# Altium PCB PCB.PcbDoc
Units mil, origin at the board's own origin, x right, y up, seen from the top; angles counter-clockwise.
Board outline 3200 x 2000 mil, 2 copper layers (Top Layer, Bottom Layer); 70 components, 58 nets, 261 pads, 72 vias.
Unrouted connection lines stored in the file: 2.
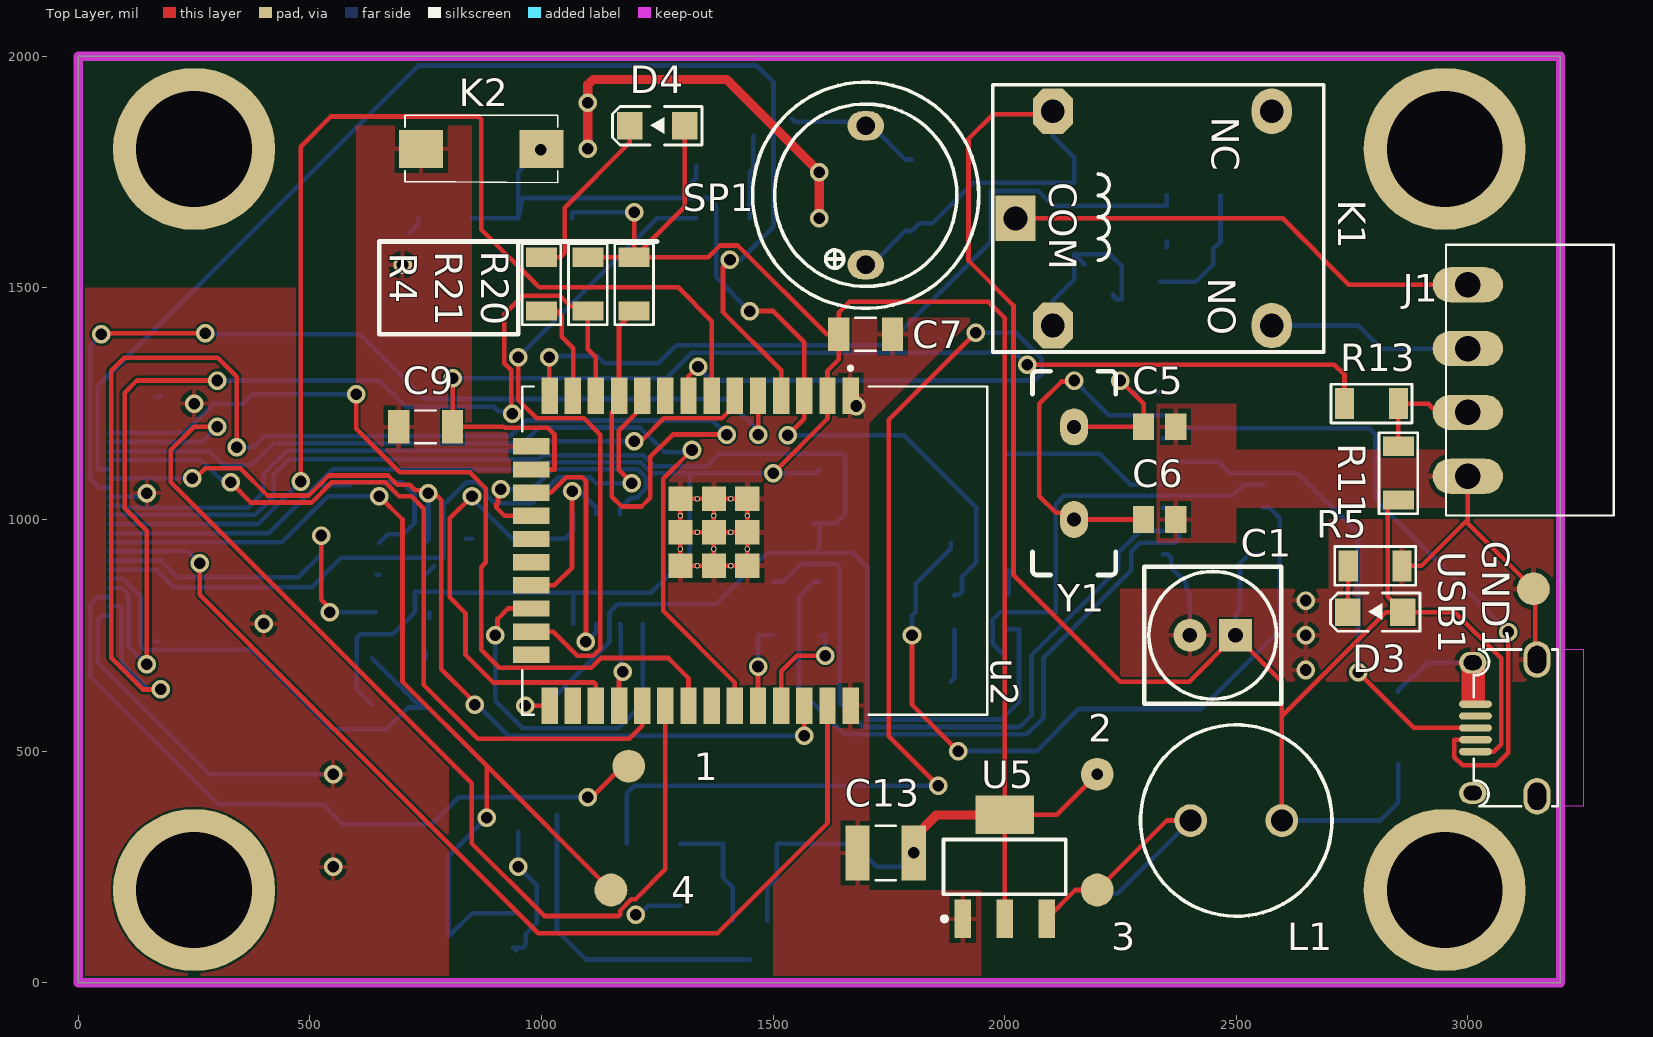
[diagram p0: Top Layer view]
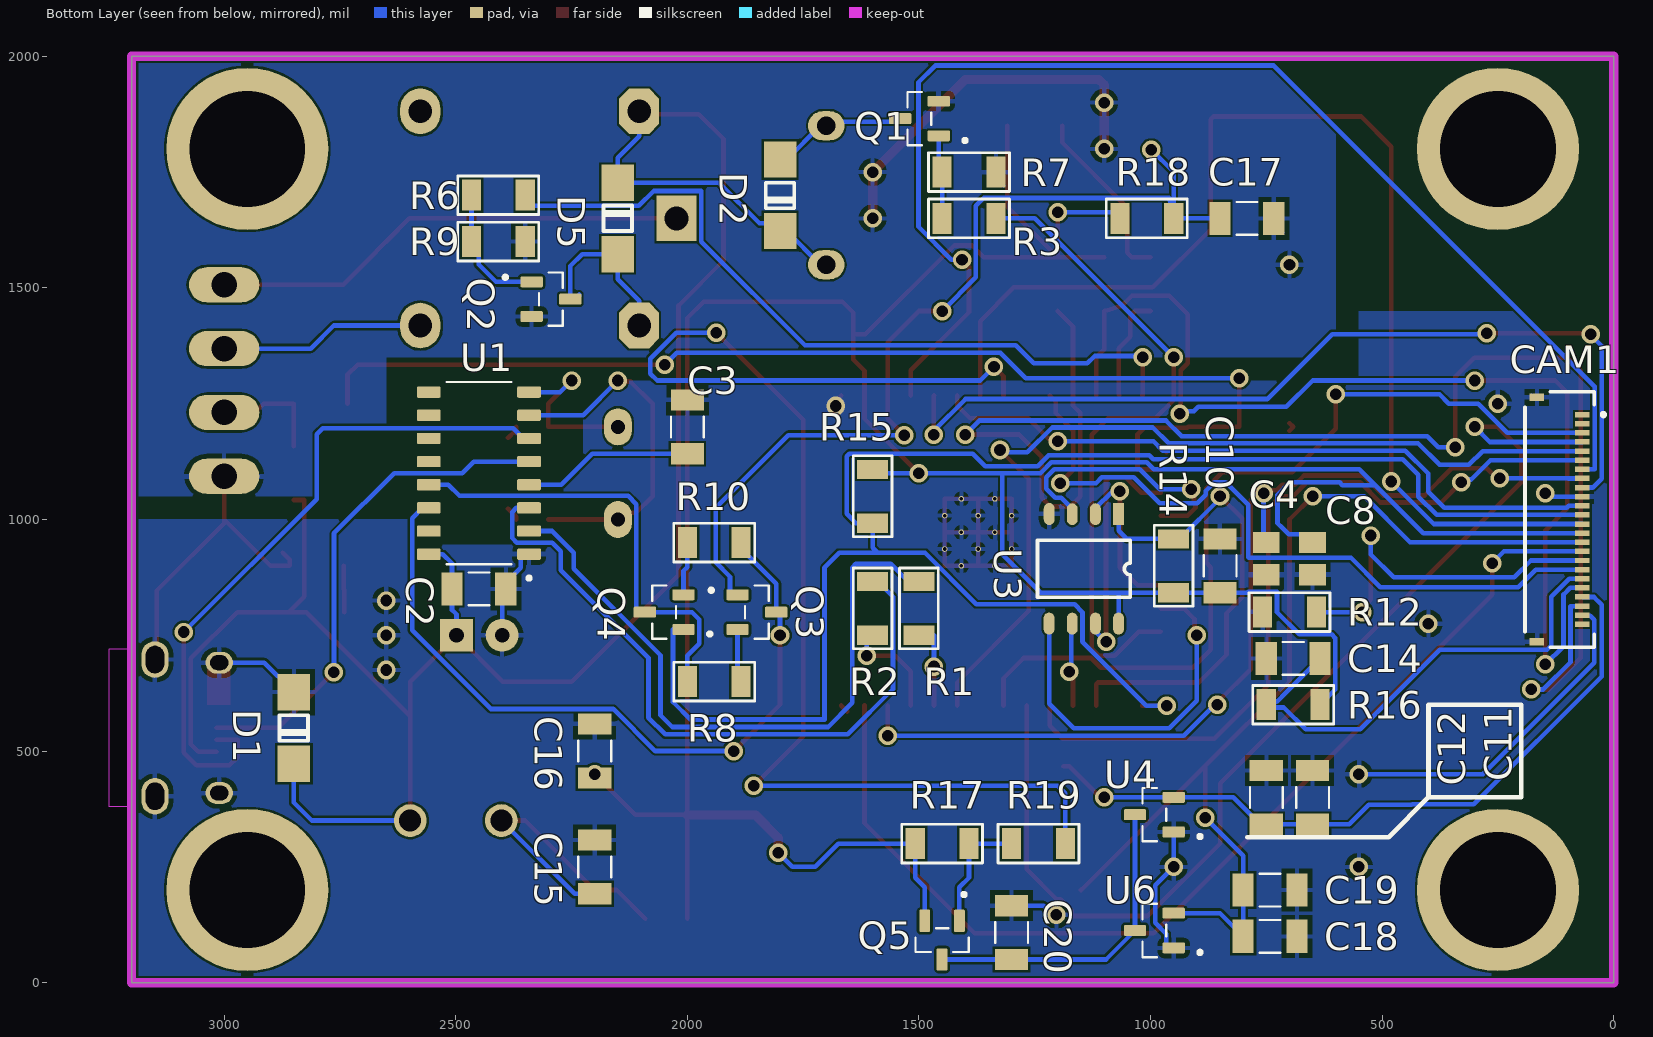
[diagram p1: Bottom Layer view, seen from below]
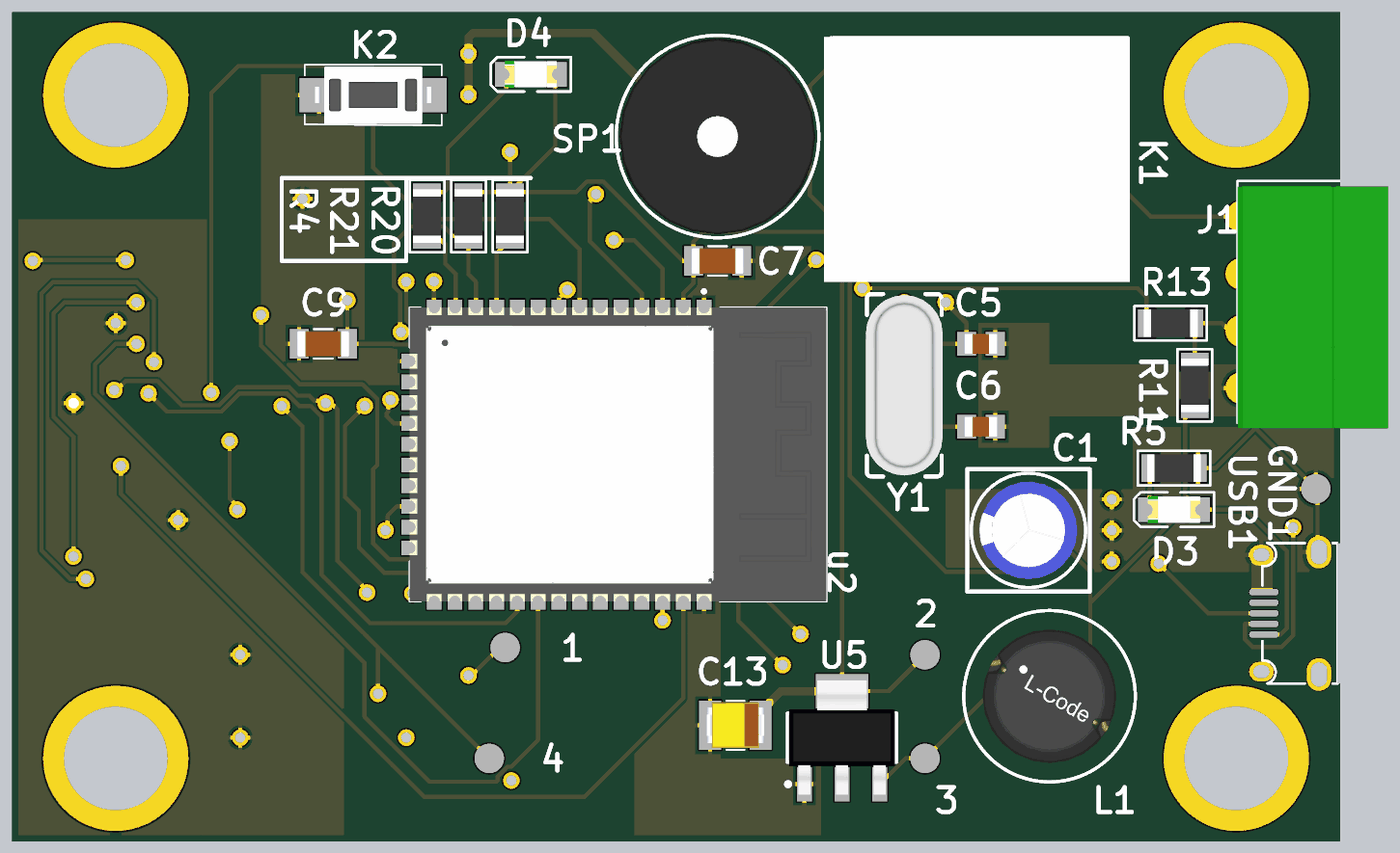
[diagram p2: 3D render of the assembled board from above, using the file's embedded part models]
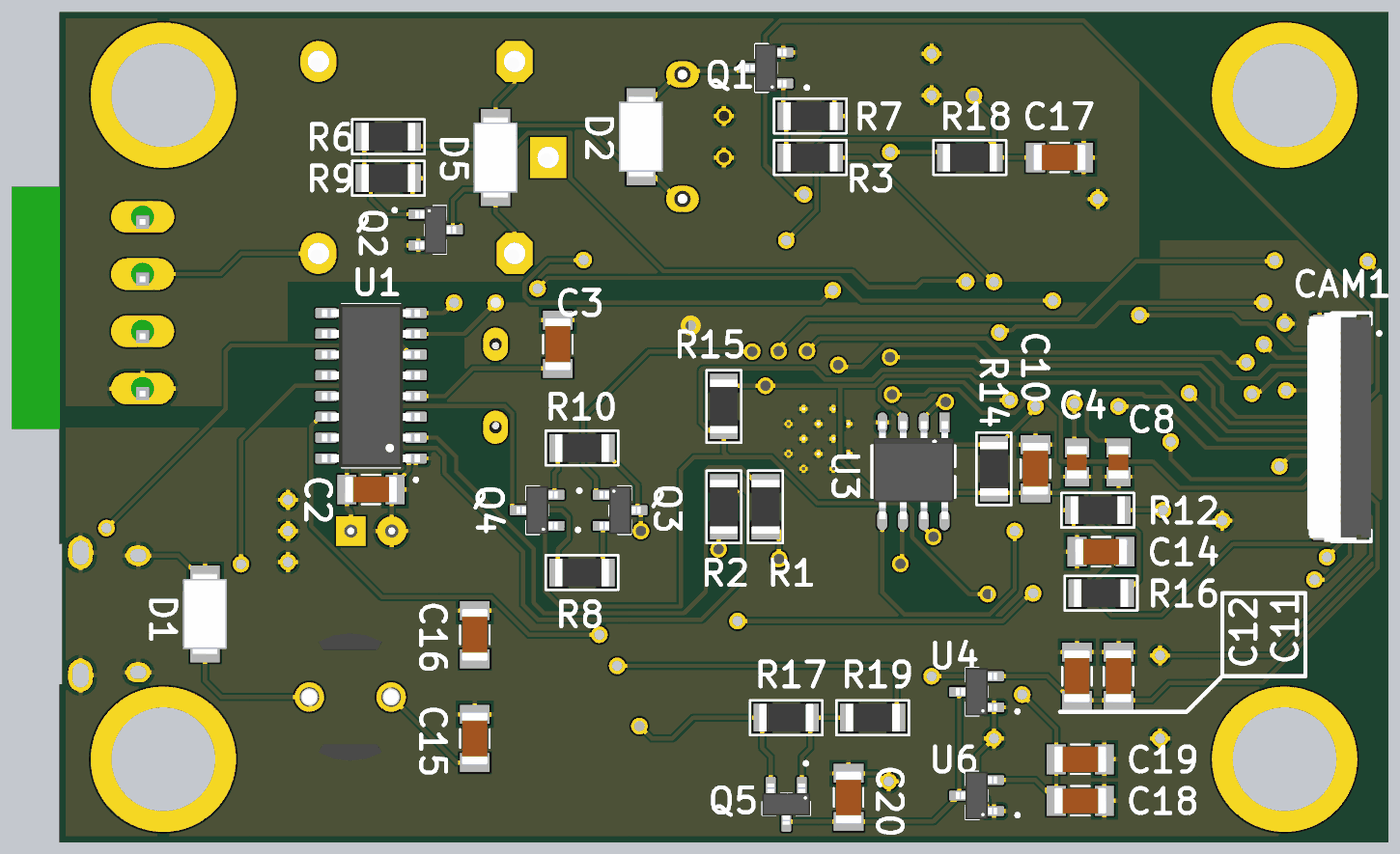
[diagram p3: 3D render of the assembled board from below, using the file's embedded part models]

## Layer stack, top to bottom
Top Solder: solder mask 0.4, Solder Resist, Dk 3.5
Top Layer: signal copper 1.4
Dielectric 1: dielectric 12.6, FR-4, Dk 4.8
Bottom Layer: signal copper 1.4
Bottom Solder: solder mask 0.4, Solder Resist, Dk 3.5

## Board outline
0,0 0,2000 3200,2000 3200,0

## Design rules (kind name [scope] priority, off if disabled: settings)
Clearance [All] p1: gap=5 ignorepadtopadclearanceinfootprint=FALSE
HoleSize [All] p1: absolutevalues=TRUE maxlimit=1000 minlimit=1 maxpercent=80.000 minpercent=20.000
MinimumSolderMaskSliver [All] p1: minsoldermaskwidth=5
PolygonConnect [All] p1: connectstyle=Relief reliefconductorwidth=10 reliefentries=4 polygonreliefangle="90 Angle" airgapwidth=10
RoutingVias [All] p1: holewidth=25 width=40 viastyle="Through Hole" minholewidth=25 minwidth=40 maxholewidth=28 maxwidth=50
SilkToSilkClearance [All] p1: silktosilkclearance=5
SolderMaskExpansion [All] p1: expansion=4 istentingtop=FALSE
SupplyNets "Schematic Supply Nets_5" [InNet('+5')] p1: voltage=0.000
SupplyNets "Schematic Supply Nets_4" [InNet('CSI_1.2V')] p2: voltage=0.000
SupplyNets "Schematic Supply Nets_3" [InNet('CSI_2.8V')] p3: voltage=0.000
SupplyNets "Schematic Supply Nets_1" [InNet('GND')] p4: voltage=0.000
SupplyNets "Schematic Supply Nets" [InNet('+3.3')] p5: voltage=0.000
Width [All] p1: maxlimit=20 minlimit=10 preferedwidth=10
27 further rules are at their usual default settings.

## Components (designator, comment, footprint, x,y, rotation, side; value= is the part's Value field where it differs from the comment)
1 "TP/2.8V" test_point 1188.27,467.44 r0 top
2 "TP/3.3V" test_point 2200,450 r90 top
3 "TP/5V" test_point 2200,200 r90 top
4 "TP/1.2V" test_point 1150,200 r90 top
C1 "100uF" TH_electrolite 2449.21,750 r180 top
C2 "0.1uF" SMD_1206 2450,850 r180 bottom
C3 "100nF" SMD_1206 2000,1200 r90 bottom
C4 "15pF" SMD_0805 750,915.35 r90 bottom
C5 "10pF" SMD_0805 2334.64,1200 r180 top
C6 "10pF" SMD_0805 2334.65,1000 r180 top
C7 "0.1uF" SMD_1206 1700,1400 r0 top
C8 "0.1uF" SMD_0805 650,915.35 r90 bottom
C9 "100nF" SMD_1206 750,1200 r180 top
C10 "1uF" SMD_1206 850,900 r270 bottom
C11 "10uF" SMD_1206 650,400 r90 bottom
C12 "0.1uF" SMD_1206 750,400 r90 bottom
C13 "100uF 10V" "B size (1210)" 1743,280 r180 top
C14 "0.1uF" SMD_1206 691.93,700 r0 bottom
C15 "10uF 16V" SMD_1206 2200,250 r90 bottom
C16 "10uF 10V" SMD_1206 2200,500 r90 bottom
C17 "0.1uF" SMD_1206 791.93,1650 r180 bottom
C18 "10uF" SMD_1206 741.93,100 r180 bottom
C19 "0.1uF" SMD_1206 741.93,200 r180 bottom
C20 "10uF" SMD_1206 1300,108.07 r90 bottom
CAM1 "FFC2B28-24-G" FFC_24pin_smd 116.73,1000 r270 bottom
D1 "SM4007" SOD-123F 2850,550 r270 bottom
D2 "SM4007" SOD-123F 1800,1700 r270 bottom
D3 "Red" LED_SMD_1206 2800,800 r0 top
D4 "Green" LED_SMD_1206 1250,1850 r0 top
D5 "SM4007" SOD-123F 2150,1650 r90 bottom
GND1 "TP/GND" test_point 3141.72,850.22 r90 top
J1 "phoenix_header_4pin" phoenix_header_4pin 3000,1300 r180 top
K1 "Relay" relay_milon 2300,1650 r270 top
K2 "Key" "key smd" 870.08,1800 r0 top
L1 "100uH" Indicator_DIP 2500,350 r180 top
Q1 "2N7002" SOT23-3L 1499.05,1865.53 r0 bottom
Q2 "2N7002" SOT23-3L 2294.55,1475.65 r180 bottom
Q3 "BC337" SOT23-3L 1850,800 r180 bottom
Q4 "BC337" SOT23-3L 2050,800 r0 bottom
Q5 "FDN360P" SOT23-3L 1450,91.73 r270 bottom
R1 "470" "resistor 1206" 1500,808.07 r270 bottom
R2 "470" "resistor 1206" 1600,808.07 r270 bottom
R3 "500" "resistor 1206" 1391.93,1650 r180 bottom
R4 "1K" "resistor 1206" 1000,1508.07 r90 top
R5 "10K" "resistor 1206" 2800,900 r180 top
R6 "1K" "resistor 1206" 2408.07,1700 r180 bottom
R7 "1K" "resistor 1206" 1391.93,1750 r0 bottom
R8 "12K" "resistor 1206" 1941.93,650 r0 bottom
R9 "8.2K" "resistor 1206" 2408.07,1600 r0 bottom
R10 "12K" "resistor 1206" 1941.93,950 r180 bottom
R11 "8.2K" "resistor 1206" 2850,1100 r90 top
R12 "1K" "resistor 1206" 700,800 r180 bottom
R13 "470" "resistor 1206" 2791.93,1250 r180 top
R14 "10K" "resistor 1206" 950,900 r90 bottom
R15 "1K" "resistor 1206" 1600,1050 r270 bottom
R16 "4.7K" "resistor 1206" 691.93,600 r180 bottom
R17 "10K" "resistor 1206" 1450,300 r0 bottom
R18 "10K" "resistor 1206" 1008.07,1650 r0 bottom
R19 "1K" "resistor 1206" 1241.93,300 r0 bottom
R20 "4.7K" "resistor 1206" 1200,1508.07 r90 top
R21 "4.7K" "resistor 1206" 1100,1508.07 r90 top
SP1 "buzzer 5V" BUZZER 1700,1700 r90 top
U1 "CH340G" SOP_16 2450,1100 r0 bottom
u2 "ESP32_MCU" "38-SMD Module" 1322.83,932.87 r270 top
U3 "IPUS_IPS6404" SOP-8 1218.74,911.83 r270 bottom
U4 "XC6206-2.8V" SOT23-3L 991.73,362.6 r0 bottom
U5 "AMS1117" SOT-223 2000,250 r90 top
U6 "XC6206-1.2V" SOT23-3L 991.73,112.6 r0 bottom
USB1 "Micro_usb" micro_usb_smd 3100,550 r0 top
Y1 "Xtal" xtal 2150,1100 r270 top

## Footprints (in the part's own frame and the unit in brackets; to place one, negate y for a bottom-side part, rotate by r counter-clockwise, add the part's x,y. Pads: shape width x height; smd on the part's side, far side on the other; paste and mask are expansions set on the pad)
"38-SMD Module" [mm] "ESP32_mcu"
  rect 2x0.9 smd: 1(-8.5,8.755) 2(-8.5,7.485) 3(-8.5,6.215) 4(-8.5,4.945) 5(-8.5,3.675) 6(-8.5,2.405) 7(-8.5,1.135) 8(-8.5,-0.135) 9(-8.5,-1.405) 10(-8.5,-2.675) 11(-8.5,-3.945) 12(-8.5,-5.215) 13(-8.5,-6.485) 14(-8.5,-7.755) 25(8.5,-7.755) 26(8.5,-6.485) 27(8.5,-5.215) 28(8.5,-3.945) 29(8.5,-2.675) 30(8.5,-1.405) 31(8.5,-0.135) 32(8.5,1.135) 33(8.5,2.405) 34(8.5,3.675) 35(8.5,4.945) 36(8.5,6.215) 37(8.5,7.485) 38(8.5,8.755)
  rect 0.9x2 smd: 15(-5.715,-8.755) 16(-4.445,-8.755) 17(-3.175,-8.755) 18(-1.905,-8.755) 19(-0.635,-8.755) 20(0.635,-8.755) 21(1.905,-8.755) 22(3.175,-8.755) 23(4.445,-8.755) 24(5.715,-8.755)
  rect 1.33x1.33 smd: 39_1(-2.835,3.09) 39_2(-1,3.09) 39_3(0.835,3.09) 39_4(-2.835,1.255) 39_5(-1,1.255) 39_6(0.835,1.255) 39_7(-2.835,-0.58) 39_8(-1,-0.58) 39_9(0.835,-0.58)
  round 0.3 hole 0.2: 39_10(-1.917,3.09) 39_11(-0.082,3.09) 39_12(-2.835,2.173) 39_13(-1,2.173) 39_14(0.835,2.173) 39_15(-1.917,1.255) 39_16(-0.082,1.255) 39_17(-2.835,0.338) 39_18(-1,0.338) 39_19(0.835,0.338) 39_20(-1.917,-0.58) 39_21(-0.082,-0.58)
  silkscreen extent -10.1,-9.25 9,16.25, body extent -9,-9.25 9,16.25, height 3.25
"B size (1210)" [mm]
  rect 1.34x3.02 smd: 1(-1.54,0) 2(1.54,0)
  silkscreen extent -0.55,-1.5 0.55,1.5, body extent -1.75,-1.4 1.75,1.4, height 2.1
BUZZER [mm]
  oval 1.6x2 hole 1: 1(-3.81,0) 2(3.81,0)
  silkscreen extent -6.2,-6.2 6.2,6.2, body extent -6,-6 6,6, height 9.5
FFC_24pin_smd [mm]
  rect 0.3x0.8 smd: 1(-5.75,1.25) 2(-5.25,1.25) 3(-4.75,1.25) 4(-4.25,1.25) 5(-3.75,1.25) 6(-3.25,1.25) 7(-2.75,1.25) 8(-2.25,1.25) 9(-1.75,1.25) 10(-1.25,1.25) 11(-0.75,1.25) 12(-0.25,1.25) 13(0.25,1.25) 14(0.75,1.25) 15(1.25,1.25) 16(1.75,1.25) 17(2.25,1.25) 18(2.75,1.25) 19(3.25,1.25) 20(3.75,1.25) 21(4.25,1.25) 22(4.75,1.25) 23(5.25,1.25) 24(5.75,1.25)
  rect 0.4x0.8 smd: S1(-6.7,-1.25) S2(6.7,-1.25)
  silkscreen extent -7,-1.9 7,2.5, body extent -7,-1.9 7,1.9, height 1.1
Indicator_DIP [mm]
  round 1.8 hole 1.2: 1(-2.5,0) 2(2.5,0)
  silkscreen extent -5.25,-5.25 5.25,5.25, body extent -4.1,-4.1 4.1,4.09, height 7.24
"key smd" [mm] "tac switch"
  rect 2.4x2.1 smd: 1(-3.3,0) 2(3.3,0)
  silkscreen extent -4.19,-1.86 4.19,1.85, body extent -3.55,-1.75 3.55,1.75, height 4.3
LED_SMD_1206 [mm]
  rect 1.4x1.5 smd: 1(-1.5,0) 2(1.5,0)
  silkscreen extent -2.45,-1.05 2.45,1.05, body extent -1.6,-0.8 1.6,0.8, height 0.68
micro_usb_smd [mm] "4 pin holder"
  oval 1.8x0.4 smd mask+0.05: 1(-2.12,-1.3) 2(-2.12,-0.65) 3(-2.12,0) 4(-2.12,0.65) 5(-2.12,1.3)
  oval 1.5x1.2 hole 0.8 slot 1 at 0 deg mask+0.05: 5(-2.271,-3.575) 5(-2.271,3.575)
  oval 1.5x2 hole 1 slot 1.5 at 90 deg mask+0.05: 5(1.255,-3.75) 5(1.255,3.75)
  Keep-Out Layer board cut-out: 2.38,4.3 3.792,4.3 3.792,-4.3 2.38,-4.3
  silkscreen extent -2.21,-4.3 2.39,4.31, body extent -2.02,-4.33 3.88,4.32, height 2.8
phoenix_header_4pin [mil]
  oval 152x76 hole 55.12: P1(0,206.69) P2(0,68.9) P3(0,-68.9) P4(0,-206.69)
  silkscreen extent -315,-293 47,291, body extent -315,-279 47,304, height 285
relay_milon [mm]
  rect 2.5x2.2 hole 1.3: 1(0,-7.025)
  oval 2.5x2.2 hole 1.3: 2(-5.875,7.025) 3(5.875,7.025)
  oct 2.5x2.2 hole 1.3: 4(-5.875,-4.975) 5(5.875,-4.975)
  silkscreen extent -7.32,-8.28 7.33,9.87, body extent -7.37,-8.71 7.63,9.98, height 15.7
"resistor 1206" [mm]
  rect 1.05x1.7 smd: 1(-1.475,0) 2(1.475,0)
  silkscreen extent -2.22,-1.06 2.22,1.06, body extent -1.65,-0.85 1.65,0.85, height 0.94
SMD_0805 [mm]
  rect 1.16x1.47 smd: 1(-0.88,0) 2(0.88,0)
  body extent -1,-0.63 1,0.63, height 0.94
SMD_1206 [mm]
  rect 1.16x1.82 smd: 1(-1.475,0) 2(1.475,0)
  silkscreen extent -0.57,-0.9 0.57,0.9, body extent -1.6,-0.8 1.6,0.8, height 1.8
SOD-123F [mm]
  rect 2x1.8 smd: 1(-1.96,0.01) 2(1.96,0.01)
  silkscreen extent -0.69,-0.8 0.71,0.84, body extent -2.5,-1.35 2.5,1.35, height 2.16
SOP-8 [mm]
  rect 1.2x0.6 smd: 1(-2.53,3.805)
  oval 1.2x0.6 smd: 2(-2.53,2.535) 3(-2.53,1.265) 4(-2.54,0) 5(3.47,-0.005) 6(3.47,1.265) 7(3.47,2.535) 8(3.47,3.805)
  silkscreen extent -1.09,-0.64 2.04,4.44, body extent -2.61,-0.55 3.39,4.38, height 1.73
SOP_16 [mm]
  rrect25% 1.31x0.62 smd: 1(-2.75,4.445) 2(-2.75,3.175) 3(-2.75,1.905) 4(-2.75,0.635) 5(-2.75,-0.635) 6(-2.75,-1.905) 7(-2.75,-3.175) 8(-2.75,-4.445) 9(2.75,-4.445) 10(2.75,-3.175) 11(2.75,-1.905) 12(2.75,-0.635) 13(2.75,0.635) 14(2.75,1.905) 15(2.75,3.175) 16(2.75,4.445)
  silkscreen extent -2.85,-5 1.78,5.85, body extent -3,-5 3,5, height 1.8
SOT23-3L [mm]
  rrect25% 1.23x0.6 smd: 1(-1.06,0.95) 2(-1.06,-0.95) 3(1.06,0)
  silkscreen extent -2.6,-1.46 0.65,1.46, body extent -1.25,-1.46 1.26,1.46, height 1.12
SOT-223 [mm]
  rect 2.1x0.9 smd: GND(-2.85,2.3) IN(-2.85,-2.3) OUT(-2.85,0)
  rect 2.1x3.2 smd: OUT(2.85,0)
  silkscreen extent -2.97,-3.35 1.5,3.42, body extent -3.49,-3.24 3.49,3.24, height 1.64
test_point [mm]
  round 1.8 smd: 1(0,0)
TH_electrolite [mm]
  rect 1.8x1.8 hole 0.8: 1(-1.25,0)
  round 1.8 hole 0.8: 2(1.25,0)
  silkscreen extent -3.75,-3.75 3.75,3.75, body extent -3,-3 3,3, height 7.3
xtal [mil]
  oval 80x60 hole 30: 1(-100,0) 2(100,0)
  silkscreen extent -220,-90 220,90, body extent -218,-93 218,93, height 461

## Part data
1 2 3 4 GND1: library part test_point
C1: library part Cap, "Cap electrolitic radial 6x7-2.5"
C2 C3 C4 C5 C6 C7 C8 C9 C10 C11 C12 C14 C15 C16 C17 C18 C19 C20: library part "cap ceramic"
C13: library part tantalium_cap_D_size
CAM1: "24 Position FFC, FPC Connector Contacts, Top and Bottom 0.020 (0.50mm) Surface Mount, Right Angle"
D3 D4: library part LED_SMD_1206
J1: "Pluggable terminal block; socket; male; 3.5mm; angled 90Â°; ways: 4"
L1: library part "Indicator DIP"
Q5: "P-Channel 30V 2A (Ta) 500mW (Ta) Surface Mount SuperSOT-3"
R1 R2 R3 R4 R5 R6 R7 R8 R9 R10 R11 R12 R13 R14 R15 R16 R17 R18 R19 R20 R21: library part "Resistor 1206"
U3: "PSRAM ESP32CAM"
U4 U6: library part XC6206

## Free pads (board coordinates)
  round 350 hole 250: SC(250,200) SC(250,1800) SC(2950,200) SC(2950,1800)

## Via types
v1: diameter 40, hole 25, Top Layer to Bottom Layer, 72 vias

## Nets (pads, with @x,y where several pads share a name; then routed paths per layer and width w, separated by ;. In a path a pad name is that pad's centre, name@x,y a point inside that pad or via, vN(x,y) a via of type N, cw(c..) or ccw(c..) an arc to the next point about the centre after c; other vN are vias at no path point)
+3.3: 2.1 C7.1 C8.2 C10.2 C13.1 C16.1 CAM1.14 D4.2 Q5.2 R14.1 R15.1 R16.2 R17.2 R18.2 R20.2 R21.2 u2.2 U3.8 U5.OUT | length 7622.8
  Top Layer w10: R21.2 1149,1566.14 R20.2 ; v1(1200,1663) R20.2 ; D4.2 1309.06,1675.2 R20.2 ; v1(1500,1100) 1617.52,1217.52 1617.52,1321 1641.93,1345.41 C7.1 ; C13.1@1803.63,305.21 1860.63,362.2 ; U5.OUT@2000,137.8 U5.OUT@2000,362.2 ; 2150,400.2 2112,362.2 ; v1(2200,450) 2112.2,362.2 2112,362.2 ; R20.2 1360,1566.14 1385.4,1591.54 1424,1591.54 1615.54,1400 C7.1 ; C7.1 1641.93,1446.93 1665,1470 1965,1470 2000,1435 U5.OUT@2000,362.2 ; U5.OUT@2000,362.2 2112,362.2
  Top Layer w20: v1(1803.63,280) 1803.63,305.21 1803.63,313.07 1852.76,362.2 1860.63,362.2 U5.OUT@2000,362.2
  Bottom Layer w10: CAM1.14 411.47,970.47 515,1074 ; R16.2 601,632.86 601,744 609,752 679,752 727,800 727,844 789,844 791.07,841.93 C10.2 885.78,841.93 938.29,841.93 R14.1 1068.95,841.93 ; C8.2 667.83,967.83 701.92,967.83 716.92,982.83 725.86,991.77 725.86,1053.34 699.21,1080 591.71,1080 585.71,1074 515,1074 ; R18.2 1066.14,1663 v1(1200,1663) ; U3.8 1068.95,841.93 ; Q5.2 1487.4,206 1508.07,226.67 R17.2 1674,300 1724,250 1773.63,250 v1(1803.63,280) ; R15.1 1591.93,1100 v1(1500,1100) 1320,1100 ; 515,1074 549.07,1108.07 993.07,1108.07 1008.59,1123.59 1213.97,1123.59 1237.56,1100 1320,1100 ; 1068.95,841.93 1236.93,841.93 1320,925 1320,1100
+5: C1.1 C2.1 D1.2 D2.2 D3.2 D5.2 K1.4 L1.1 R11.1 SP1.1 U1.16 USB1.1 | length 4689.5
  Top Layer w10: K1.4 2097.84,1875 1975,1875 1921.91,1821.91 1921.91,1559.09 2019,1462 2019,881 2250,650 2338.71,650 ; L1.1 2598.43,575.43 ; R11.1 2827,1041.93 2827,833.06 2859.06,801 D3.2 ; USB1.1 3056,498.82 3072,514.82 3072,700 2972,800 D3.2 ; 2338.71,650 2383.09,650 ; 2338.71,650 2383.09,650 ; 2383.09,650 2398.43,650 C1.1 2598.43,650 2598.43,575.43 ; 2598.43,575.43 2823,800 D3.2
  Bottom Layer w10: SP1.1 1713,1550 1785.83,1622.83 D2.2 1816.04,1639.27 1844.18,1639.27 1932.08,1727.17 D5.2 2150.4,1781 2104.13,1827.26 K1.4 ; C1.1 2498.43,795 2508.07,804.65 C2.1 2508.07,905.07 2528,925 U1.16 ; L1.1 2810.6,350 2849.6,389 D1.2
B_Q?: Q3.2 R8.1 | length 115.9
  Bottom Layer w10: R8.1 1891.73,657.87 Q3.2
B_Q??: Q4.2 R10.1 | length 116
  Bottom Layer w10: R10.1 2000,897.27 2008.27,889 Q4.2
Boot: CAM1.12 Q4.1 R15.2 u2.25 | length 3792.2
  Top Layer w10: v1(965,598) 1017.52,598 u2.25
  Bottom Layer w10: CAM1.12 382.42,1009.84 421.77,1049.19 421.77,1096.68 455.46,1130.37 994.16,1130.37 1002.37,1138.59 1220.18,1138.59 1243.77,1115 1356.84,1115 1383.84,1142 1650.14,1142 1656,1136.14 1656,1012 1635.93,991.93 R15.2 ; v1(965,598) 1009,598 1147,736 1147,800 1164,817 1376,817 1487,928 1589,928 ; R15.2@1587,991.93 R15.2 ; Q4.1 2031,762.6 2031,606 1993,568 1704,568 1704,896 1672,928 1589,928 ; 1589,928 1600,939 R15.2
BUZZER: R3.2 u2.23 | length 1446.8
  Top Layer w10: v1(950,1350) 950,1257.95 989.8,1218.15 1091.85,1218.15 1127,1183 1127,721 1112,706 1077,706 1025.13,757.87 u2.23@978.15,757.87
  Bottom Layer w10: v1(950,1350) 1250,1650 R3.2
CSI_1.2V: 4.1 C18.1 C19.1 CAM1.15 U6.2 | length 2253.4
  Top Layer w10: v1(650,1050) 700,1000 700,650 882,468 ; v1(882,356) 882,468 ; 4.1 882,468
  Bottom Layer w10: CAM1.15 439.79,950.79 539,1050 v1(650,1050) ; v1(882,356) 800,274 C19.1 C18.1 850,150 U6.2
CSI_2.8V: 1.1 C11.1 C12.1 CAM1.21 U4.2 | length 1628.8
  Top Layer w10: v1(1100,400) 1108.12,400 1175.56,467.44 1.1
  Bottom Layer w10: CAM1.21 42.68,832.68 26,816 26,661 302,385 435,385 436.14,383.86 528.93,383.86 570.86,341.93 C11.1 C12.1 762.99,341.93 821.06,400 ; 900,400 821.06,400 ; v1(1100,400) U4.2 821.06,400
D+: U1.5 USB1.3 | length 1088.7
  Top Layer w10: v1(2763,670) 2883,550 USB1.3
  Bottom Layer w10: U1.5 2461,1125 2486,1100 2633,1100 2763,970 v1(2763,670)
D-: U1.6 USB1.2 | length 1498.4
  Top Layer w10: USB1.2 2971.08,524.41 2971.08,486.92 2989,469 3060,469 3087,496 v1(3087,757)
  Bottom Layer w10: U1.6 2355.31,1175 2362.52,1182.2 2362.52,1184.1 2375.62,1197.2 2786.9,1197.2 2800,1184.1 2800,1044 v1(3087,757)
Drain_Q1: D2.1 Q1.3 SP1.2 | length 295.4
  Bottom Layer w10: Q1.3 1547.6,1858.72 1691.28,1858.72 SP1.2 1713,1850 1785.84,1777.16 D2.1
Drain_Q2: D5.1 K1.5 Q2.3 | length 425.1
  Bottom Layer w10: K1.5 2104.13,1472 2150.4,1518.26 2150.4,1568.9 D5.1 ; D5.1@2173.23,1550 D5.1 ; Q2.3@2233.61,1485.69 2233.61,1482.46 2240.42,1475.65 Q2.3@2243.37,1475.65 ; Q2.3@2236.56,1482.46 Q2.3@2243.37,1475.65 ; D5.1 2227.16,1572.84 2252.82,1547.18 Q2.3 Q2.3@2243.37,1475.65
DTR: Q4.3 R8.2 U1.13 | length 986.1
  Bottom Layer w10: R8.2 2000,706 1974,732 1974,784 1990,800 Q4.3 2110,800 2110,1033 2128,1051 2492,1051 2516,1075 U1.13
Gate_Q1: Q1.1 R3.1 R7.2 | length 181.2
  Bottom Layer w10: R3.1 R7.2 1457.32,1757.32 1457.32,1803.38 Q1.1
Gate_Q2: Q2.1 R6.1 R9.2 | length 285.7
  Bottom Layer w10: Q2.1 2413.05,1513.05 2450.47,1550.47 2450.47,1584.33 R9.2 2466.14,1660.14 R6.1
GND: C1.2 C2.2 C3.2 C4.1 C5.1 C6.1 C7.2 C8.1 C9.2 C10.1 C11.2 C12.2 C13.2 C14.2 C15.2 C16.2 C17.2 C18.2 C19.2 C20.2 CAM1.10 CAM1.23 CAM1.S1 CAM1.S2 D1.1 GND1.1 J1.P1 K2.1 Q1.2 Q2.2 R5.1 R7.1 R9.1 R12.1 U1.1 u2.1 u2.15 u2.38 u2.39_1 u2.39_2 u2.39_3 u2.39_4 u2.39_5 u2.39_6 u2.39_7 u2.39_8 u2.39_9 u2.39_10 u2.39_11 u2.39_12 u2.39_13 u2.39_14 u2.39_15 u2.39_16 u2.39_17 u2.39_18 u2.39_19 u2.39_20 u2.39_21 U3.4 U4.1 U5.GND U6.1 USB1.5 | length 4341.5
  Top Layer w10: C9.2@700,1191.93 C9.2 C9.2@700,1208.07 ; u2.15@965.43,1145.16 u2.15 ; u2.38@1654.8,585.51 u2.38 ; u2.1@1680.24,1254.14 u2.1@1671.16,1263.22 ; C6.1 2369.29,1005.61 C6.1@2387.13,1023.44 ; C5.1@2369.29,1186.02 C5.1@2373.23,1189.96 ; C5.1 2369.29,1193.9 C5.1@2373.23,1189.96 ; C5.1@2387.12,1176.06 C5.1@2373.23,1189.96 ; R5.1@2873.74,928.46 2858.07,912.8 R5.1 2900,900 3000,1000 ; J1.P1@2993.31,1100 J1.P1 3000,1000 ; USB1.5@3149.39,697.64 3145.56,701.47 3145.56,846.39 GND1.1 3000,991.95 3000,1000 ; u2.39_8 u2.39_18 u2.39_5 ; u2.39_8 u2.39_21 u2.39_9 u2.39_19 u2.39_6 ; u2.39_8 u2.39_20 u2.39_7 u2.39_17 u2.39_4 ; u2.39_6 u2.39_14 u2.39_3 u2.39_11 u2.39_2 ; u2.39_6 u2.39_16 u2.39_5 ; u2.39_5 u2.39_13 u2.39_2 ; u2.39_5 u2.39_15 u2.39_4 ; u2.39_4 u2.39_12 u2.39_1 u2.39_10 u2.39_2 ; u2.1@1671.16,1263.22 1667.52,1266.86 u2.1 1671.16,1263.88 u2.1@1671.16,1263.22
  Top Layer w20: v1(1100,1800) 1100,1938.28 1111.72,1950 1400,1950 v1(1600,1750) v1(1600,1650)
  Bottom Layer w10: CAM1.23 66.61,792.4 50.5,792.4 41.77,783.67 41.77,690.56 282.33,450 v1(550,450) ; CAM1.10 132.36,1049.21 140.01,1056.86 v1(148.13,1056.86) ; CAM1.S2 CAM1.S2@173.82,736.22 ; CAM1.S1 173.82,1263.78 CAM1.S1@176.69,1266.65 ; C8.1@643.9,880.71 C8.1 ; C17.2@716.02,1619.17 733.86,1637.01 C17.2 ; C14.2 C14.2@750,712.99 ; C4.1 C4.1@767.83,898.54 ; R12.1@758.07,787.2 R12.1 ; C10.1@837.01,958.07 C10.1 ; U6.1@937.6,75.2 U6.1 ; U6.1@944.14,69.34 U6.1 ; U4.1 v1(950,250) 990.12,209.88 990.12,128.98 966.26,105.11 966.26,82.01 959.45,75.2 U6.1 ; v1(1203.34,146.66) 1211.46,146.66 1230.94,166.14 C20.2 ; R7.1@1318.19,1721.54 1333.86,1737.2 R7.1@1333.86,1762.8 ; U1.1 2352.26,925 2359.47,917.8 2359.47,895.45 2391.93,862.99 C2.2 2400,841.93 C1.2 ; R9.1@2350,1587.2 R9.1 ; D1.1 2849.6,631.1 2880.04,661.53 2883.97,661.53 2913.19,690.75 USB1.5@3010.61,690.75
  other v1: 550,250 2650,675 2650,750 400,775 2650,825 1680,1245 250,1250 700,1550 1100,1900
IO16: R14.2 u2.27 U3.1 | length 1032.2
  Top Layer w10: v1(850,1050) 802.21,1002.21 802.21,831.71 836,797.93 836,708 896,648 1113.52,648 1117.52,644 u2.27
  Bottom Layer w10: v1(850,1050) 850,1045.28 937.2,958.07 1051.02,958.07 1068.95,976 U3.1
LED_status: R4.1 u2.13 | length 231.5
  Top Layer w10: R4.1 1034,1450 1044,1440 1044,1394.34 1068.93,1369.41 1068.93,1316.04 ; u2.13 1068.92,1268.92 1068.92,1316.03
Net3_1: 3.1 C15.1 L1.2 U5.IN | length 666
  Top Layer w10: U5.IN 2152.76,200 3.1 2350,350 L1.2
  Bottom Layer w10: C15.1 2243.5,191.93 L1.2
NetC3_1: C3.1 U1.4 | length 369.5
  Bottom Layer w10: C3.1 2205.07,1141.93 2272,1075 U1.4
NetC4_2: C4.2 CAM1.8 u2.36 | length 2188.2
  Top Layer w10: v1(246.29,1088.58) 251.95,1088.58 273.87,1110.5 349.7,1110.5 408.52,1051.68 497.76,1051.68 541.08,1095 668.64,1095 688.64,1075 715.64,1075 727.9,1062.74 v1@761.74,1062.74 ; v1(756,1057) v1@761.74,1062.74 ; v1@850,600 850,611 784,677 784,1042 762.5,1063.5 v1@761.74,1062.74 ; v1(1567.52,533) u2.36
  Bottom Layer w10: CAM1.8 98,1088.58 98.42,1089 245.87,1089 v1(246.29,1088.58) ; C4.2 756,956 v1(756,1057) ; v1@850,600 861,600 928,533 v1(1567.52,533)
  other v1: 855.5,600
NetC14_1: C14.1 CAM1.19 R16.1 | length 1061.7
  Bottom Layer w10: CAM1.19 96,872.05 135,833.05 135,727.35 144,718.35 375.65,718.35 547,547 665,547 712,594 742.91,594 750,594 R16.1 742.91,598.11 734.33,603.07 725.93,607.93 709.31,624.55 C14.1
NetC20_1: C20.1 Q5.3 U4.3 U6.3 | length 692.5
  Bottom Layer w10: U4.3 1033.46,237 U6.3 1096.06,50 C20.1 Q5.3
NetCAM1_3: CAM1.3 u2.31 | length 1875.9
  Top Layer w10: v1(600,1270) 600,1196 694,1102 844.86,1102 880,1066.86 880,907.22 870,897.22 870,718.65 908.49,680.16 1107.37,680.16 1128.01,700.79 1274.21,700.79 1317.52,657.48 u2.31
  Bottom Layer w10: CAM1.3 229.43,1187.01 292.43,1250 356.12,1250 376.12,1270 v1(600,1270)
NetCAM1_4: CAM1.4 u2.30 | length 2368.6
  Top Layer w10: v1(300,1200) 250,1200 200,1150 200,1080 450,830 480,800 849.55,430.45 849.55,300.45 1006,144 1167,144 1170,147 1170,155.75 1194.25,180 1203,180 1267.52,244.52 u2.30
  Bottom Layer w10: CAM1.4 267.32,1167.32 v1(300,1200)
NetCAM1_5: CAM1.5 u2.33 | length 1968.9
  Top Layer w10: v1(1325,1150) 1263,1088 1263,802.52 1417.52,648 u2.33
  Bottom Layer w10: CAM1.5 282.93,1147.64 312.57,1118 375.98,1118 422.48,1164.5 961,1164.5 995.09,1198.59 1212.53,1198.59 1266.11,1145 1320,1145 v1(1325,1150)
NetCAM1_6: CAM1.6 u2.29 | length 1713.5
  Top Layer w10: v1(328.86,1080.5) 372.68,1036.68 503.97,1036.68 547.29,1080 662.43,1080 692.43,1050 719.43,1050 746,1023.43 746,642.64 862.3,526.34 1189.34,526.34 1217.52,554.52 u2.29
  Bottom Layer w10: CAM1.6 266.08,1127.95 307.8,1086.24 323.12,1086.24 v1(328.86,1080.5)
NetCAM1_7: CAM1.7 u2.4 | length 2754.4
  Top Layer w10: v1(1407,1561) 1392,1546 1392,1447.52 1517.52,1322 u2.4
  Bottom Layer w10: CAM1.7 41,1108.27 41,1287 734,1980 1465.14,1980 1501,1944.14 1501,1632 1430,1561 v1(1407,1561)
NetCAM1_9: CAM1.9 u2.5 | length 1970.3
  Top Layer w10: v1(50,1400) 51.89,1401.89 v1(274.29,1401.89) ; u2.5 1468.38,1266.66 v1(1468.38,1183.27)
  Bottom Layer w10: v1(50,1400) 50,1398.5 26,1374.5 26,1088 45.1,1068.9 CAM1.9 ; v1(274.29,1401.89) 276.19,1400 608,1400 748,1260 1399.52,1260 1468.38,1191.14 v1(1468.38,1183.27)
NetCAM1_11: CAM1.11 u2.6 | length 1487.9
  Top Layer w10: v1(1200.1,1168.59) 1205.84,1174.33 1220.33,1174.33 1264.15,1218.15 1389.38,1218.15 1393.49,1222.26 1393.91,1222.26 1417.52,1245.87 u2.6
  Bottom Layer w10: CAM1.11 96.68,1029.53 101.21,1025 365.44,1025 400.73,1060.29 400.73,1099.27 450.16,1148.71 973.71,1148.71 993.59,1168.59 v1(1200.1,1168.59)
NetCAM1_13: CAM1.13 u2.7 | length 2571.7
  Top Layer w10: v1(480,1082) 480,1805 545,1870 864.14,1870 870,1864.14 870,1626 995,1501 1295,1501 1368,1428 1368,1300.37 1367.52,1299.89 u2.7
  Bottom Layer w10: CAM1.13 388.16,990.16 v1(480,1082)
NetCAM1_16: CAM1.16 u2.37 | length 2283.3
  Top Layer w10: v1(262.53,905.47) 262.53,837.47 993,107 1380,107 1617.52,344.52 u2.37
  Bottom Layer w10: CAM1.16 236.9,931.1 v1(262.53,905.47)
NetCAM1_17: CAM1.17 R12.2 | length 805.3
  Top Layer w10: v1(524.3,965.33) 524.3,826.81 543,808.12 v1(543,800)
  Bottom Layer w10: CAM1.17 178.58,911.42 215,875 475,875 524.3,924.3 v1(524.3,965.33) ; v1(543,800) R12.2
NetCAM1_18: CAM1.18 u2.10 | length 1576.2
  Top Layer w10: v1(1195.33,1078.59) 1167,1106.92 1167,1192 1204.8,1229.8 1204.8,1254.8 u2.10
  Bottom Layer w10: CAM1.18 168,891.73 205.73,854 504,854 567.16,917.16 787.88,917.16 788.94,918.22 788.94,1031.36 837.57,1080 862.43,1080 881,1061.43 881,1053.75 899.57,1035.18 980.18,1035.18 1036,1091 1105.4,1091 1117.81,1078.59 v1(1195.33,1078.59)
NetCAM1_20: CAM1.20 R21.1 u2.12 | length 2317.6
  Top Layer w10: v1(148,687) 148,976.08 100,1024.08 100,1273.8 126.2,1300 v1(300,1300) ; v1(937.26,1228.26) 935,1230.52 935,1322.57 920,1337.57 920,1443 960,1483 1040,1483 1062,1461 R21.1 1100,1367.52 1117.52,1350 u2.12
  Bottom Layer w10: CAM1.20 94,852.36 108.27,838.09 108.27,726.73 v1(148,687) ; v1(300,1300) 650,1300 707,1243 897.26,1243 906.26,1234 931.52,1234 v1(937.26,1228.26)
NetCAM1_22: CAM1.22 R20.1 u2.11 | length 3351
  Top Layer w10: v1(178,633) 139,633 71,701 71,1321 98.79,1348.79 301.21,1348.79 342,1308 v1(342,1156) ; R20.1 1167.52,1417.52 u2.11 1167.52,1246 1152,1230.48 1152,1049 1173,1028 1216,1028 1235,1047 1235,1135 1283.36,1183.36 v1(1400.23,1183.36)
  Bottom Layer w10: CAM1.22 93.27,812.99 93.27,691.73 152,633 v1(178,633) ; v1(342,1156) 379,1156 403,1180 933,1180 966.59,1213.59 1370,1213.59 v1(1400.23,1183.36)
NetD3_1: D3.1 R5.2 | length 100.4
  Top Layer w10: D3.1 2740.94,849 2741.93,849.98 R5.2
NetD4_1: D4.1 R4.2 | length 386.5
  Top Layer w10: R4.2 1040.14,1566.14 1050,1576 1050,1673 1190.94,1813.94 D4.1
NetQ5_1: Q5.1 R17.1 R19.2 | length 267
  Bottom Layer w10: R19.2 R17.1 1391.93,226.67 1412.6,206 Q5.1
NetR6_2: R6.2 u2.14 | length 1678.8
  Top Layer w10: v1(1016.71,1350.63) 1016.71,1268.33 u2.14
  Bottom Layer w10: v1(1016.71,1350.63) 1019.02,1352.95 1120.81,1352.95 1136.76,1337 1252.4,1337 1291.41,1376.01 1746.01,1376.01 1970,1600 1970,1709.21 2072.79,1709.21 2105,1677 2350,1677 R6.2
NetR19_1: R19.1 u2.8 | length 2917.7
  Top Layer w10: u2.8 1317.52,1309.52 v1(1338,1330) ; v1(1857,425) 1750,532 1750,1215 v1(1938,1403)
  Bottom Layer w10: R19.1 1183.86,408.86 1200,425 v1(1857,425) ; v1(1338,1330) 1368,1300 2065.17,1300 2080,1314.83 2080,1346.83 2023.83,1403 v1(1938,1403)
Pedal_C1: J1.P2 R11.2 R13.1 | length 249.8
  Top Layer w10: R11.2 R13.1 2915,1250 2933.9,1231.1 J1.P2
Pedal_trigger: C9.1 R13.2 u2.16 | length 2488
  Top Layer w10: v1(808.07,1305) C9.1 918.95,1200 920.69,1198.26 1013.74,1198.26 1028,1184 1028,1107.87 u2.16@978.15,1107.87 ; v1(2049,1334) 2711.86,1334 2733.86,1312 R13.2
  Bottom Layer w10: v1(808.07,1305) 1269,1305 1324,1360 2023,1360 v1(2049,1334)
Press_C1: J1.P4 K1.1 | length 1106.6
  Top Layer w10: K1.1 2600,1650 ; 2650,1600 2600,1650 ; J1.P4 2743.31,1506.69 2600,1650
Press_C2: J1.P3 K1.3 | length 444.1
  Bottom Layer w10: K1.3 2763,1418.7 2812.8,1368.9 J1.P3
PSRAM_CLK: u2.28 U3.6 | length 183.1
  Top Layer w10: u2.28 1167.52,663.57 1174.74,670.79 v1(1175.29,670.79)
  Bottom Layer w10: U3.6 1171.56,772.6 1171.56,674.52 v1(1175.29,670.79)
Reset: C17.1 K2.2 Q3.1 R18.1 u2.3 | length 2044.9
  Top Layer w10: v1(998.2,1798.36) 999.84,1800 K2.2 ; v1(1450,1450) 1500,1450 1567.52,1382.48 u2.3 1567.52,1217.79 v1(1531.95,1182.22)
  Bottom Layer w10: C17.1 R18.1 ; v1(998.2,1798.36) 950,1750.16 R18.1 ; v1(1450,1450) 1377,1523 1377,1677 1360,1694 960,1694 R18.1 ; v1(1531.95,1182.22) 1672.15,1182.22 1781.76,1182.22 1938.97,1025 1938.97,907.53 1907.99,876.54 1907.99,844.21 1901.18,837.4 Q3.1 Q3.1@1891.73,835.03
RTS: Q3.3 R10.2 U1.14 | length 1616.3
  Top Layer w10: v1(1800,750) 1800,600 v1(1900,500)
  Bottom Layer w10: v1(1800,750) 1800,793.19 1806.81,800 Q3.3@1808,800 ; Q3.3 Q3.3@1808,800 ; R10.2 1883.86,937 1808,861.14 Q3.3@1808,800 ; v1(1900,500) 2069.13,500 2160.03,590.9 2424.34,590.9 2594.06,760.62 2594.06,1002.8 2571.85,1025 U1.14
RXD_ch: R2.1 U1.3 | length 1490.5
  Bottom Layer w10: R2.1 1589.14,866.14 1556,833 1556,634 1654,536 2048,536 2084,572 2084,701 2273,890 2273,931 2292,950 2368,950 2378,960 2378,1016 2369,1025 U1.3
RXD_m: R2.2 u2.35 | length 240.3
  Top Layer w10: u2.35 1517.52,672 1551.52,706 v1(1613,706)
  Bottom Layer w10: R2.2 1613,750 v1(1613,706)
SD0: u2.21 U3.2 | length 349.5
  Top Layer w10: u2.21@978.15,857.87 1027.87,857.87 1066,896 v1(1066,1061)
  Bottom Layer w10: v1(1066,1061) 1082,1061 1118.95,1024.05 U3.2
SD1: u2.22 U3.5 | length 799.7
  Top Layer w10: v1(900,750) 905,755 905,785 927.87,807.87 u2.22@978.15,807.87
  Bottom Layer w10: v1(900,750) 900,609 960,549 1165.95,549 1218.95,602 U3.5
SD2: u2.17 U3.7 | length 530.6
  Top Layer w10: u2.17@978.15,1057.87 1020.42,1057.87 1053.54,1091 1088,1091 1096,1083 v1(1096,736)
  Bottom Layer w10: v1(1096,736) 1118.95,758.95 U3.7
SD3: u2.18 U3.3 | length 575.7
  Top Layer w10: v1(912,1065.18) 906.26,1059.44 906.26,1036.78 902.95,1033.46 902.95,1025.18 920.25,1007.87 u2.18@978.15,1007.87
  Bottom Layer w10: v1(912,1065.18) 912.18,1065 980,1065 1023.59,1108.59 1207.76,1108.59 1225.33,1091.01 1225.33,1066.16 1206.09,1046.92 1192.64,1046.92 1168.95,1023.24 U3.3
TXD_ch: R1.1 U1.2 | length 1445.5
  Bottom Layer w10: R1.1 1523,866.14 1560.86,904 1636,904 1644,896 1644,604 1696,552 2033,552 2058,577 2058,707 2245,894 2245,928 2292,975 U1.2
TXD_m: R1.2 u2.34 | length 184.3
  Top Layer w10: u2.34 v1(1467.52,682.52)
  Bottom Layer w10: v1(1467.52,682.52) 1467.52,750 R1.2
xtal_1: C5.2 U1.8 Y1.1 | length 372.8
  Top Layer w10: Y1.1 C5.2 2300,1250 v1(2250,1300)
  Bottom Layer w10: v1(2250,1300) 2275,1275 U1.8
xtal_2: C6.2 U1.7 Y1.2 | length 764.2
  Top Layer w10: v1(2150,1300) 2147.75,1297.75 2122.75,1297.75 2075,1250 2075,1050 2110.86,1014.14 2135.86,1014.14 Y1.2 C6.2
  Bottom Layer w10: v1(2150,1300) 2225,1225 U1.7
pads on no net: CAM1.1 CAM1.2 CAM1.24 K1.2 U1.9 U1.10 U1.11 U1.12 U1.15 u2.9 u2.19 u2.20 u2.24 u2.26 u2.32 USB1.4

## Polygon pours and split planes (outlines as drawn)
GND on Bottom Layer "GND_L02_P002" (solid, remove dead copper, pour order 2): 3200,1050 2650,1050 2650,1350 600,1350 600,2000 3200,2000
GND on Bottom Layer "GND_L02_P003" (solid, remove dead copper, pour order 3): 3200,0 3200,1000 2600,1000 2600,1300 550,1300 550,1450 0,1450 0,0
GND on Top Layer "GND_L01_P020" (solid, remove dead copper, pour order 20): 1000,1300 1625,1300 1625,1450 1925,1450 1925,1425 1708,1208 1708,200 1950,200 1950,0 1500,0 1500,550 1000,550
GND on Top Layer "GND_L01_P021" (solid, remove dead copper, pour order 21): 500,1500 500,1100 800,1100 800,0 450,0 0,0 0,400 0,1500
GND on Top Layer "GND_L01_P017" (solid, remove dead copper, pour order 17): 2328,1250 2328,950 2500,950 2500,1025 2950,1025 2950,1150 2500,1150 2500,1250
GND on Top Layer "GND_L01_P013" (solid, remove dead copper, pour order 13): 600,1850 850,1850 850,1200 1050,1200 1050,1100 600,1100
GND on Top Layer "GND_L01_P008" (solid, remove dead copper, pour order 8): 2250,850 2700,850 2700,1000 3200,1000 3200,650 2250,650

## Keep-outs
Keep-Out Layer:
  the board outline again, w20

## Other copper
Top Layer:
  rectangle net GND: 2986.51,599.93 3037.62,691.33
Bottom Layer:
  pour cut-out: 2375,945 2600,945 2600,1190 2376.84,1190 2375,1191.84 2375,1215 2225,1215 2225,1130 2295,1060 2375,1060
  pour cut-out: 150,1000 450,1000 450,1200 400,1200 342,1156 150,1150

## Silkscreen, mask and mechanical layers (free items; w line width, h text height)
Top Overlay:
  lines w10: 950,1600 950,1400 650,1400 650,1600 1250,1600
Bottom Overlay:
  lines w10: 790.83,314.09 485.91,314.09 400,400 ; 400,400 400,600 200,600 200,400 400,400
Drill Drawing:
  rectangle: 2900,1055 3000,1130

## Text inside footprints (layer, text, board x,y; h text height)
K1: Top Overlay "NC" at 2447,1870 h59.06 r270; Top Overlay "NO" at 2440,1522 h59.06 r270; Top Overlay "COM" at 2096,1728 h59.06 r270
u2: Mechanical 13 "ANTENNA" at 1814.76,1169.09 h70 r270
USB1: Mechanical 1 "PCB EDGE" at 3201.56,620.87 h19.68 r270